# Altium PCB DriverFitTracker.PcbDoc
Units mm, origin at the board's own origin, x right, y up, seen from the top; angles counter-clockwise.
Board outline 31 x 26 mm, 4 copper layers (L1 (SIGNAL), L2 (GND), L3 (3V3), L4 (SIGNAL)), stack 1.586 mm thick; 55 components, 38 nets, 226 pads, 126 vias.
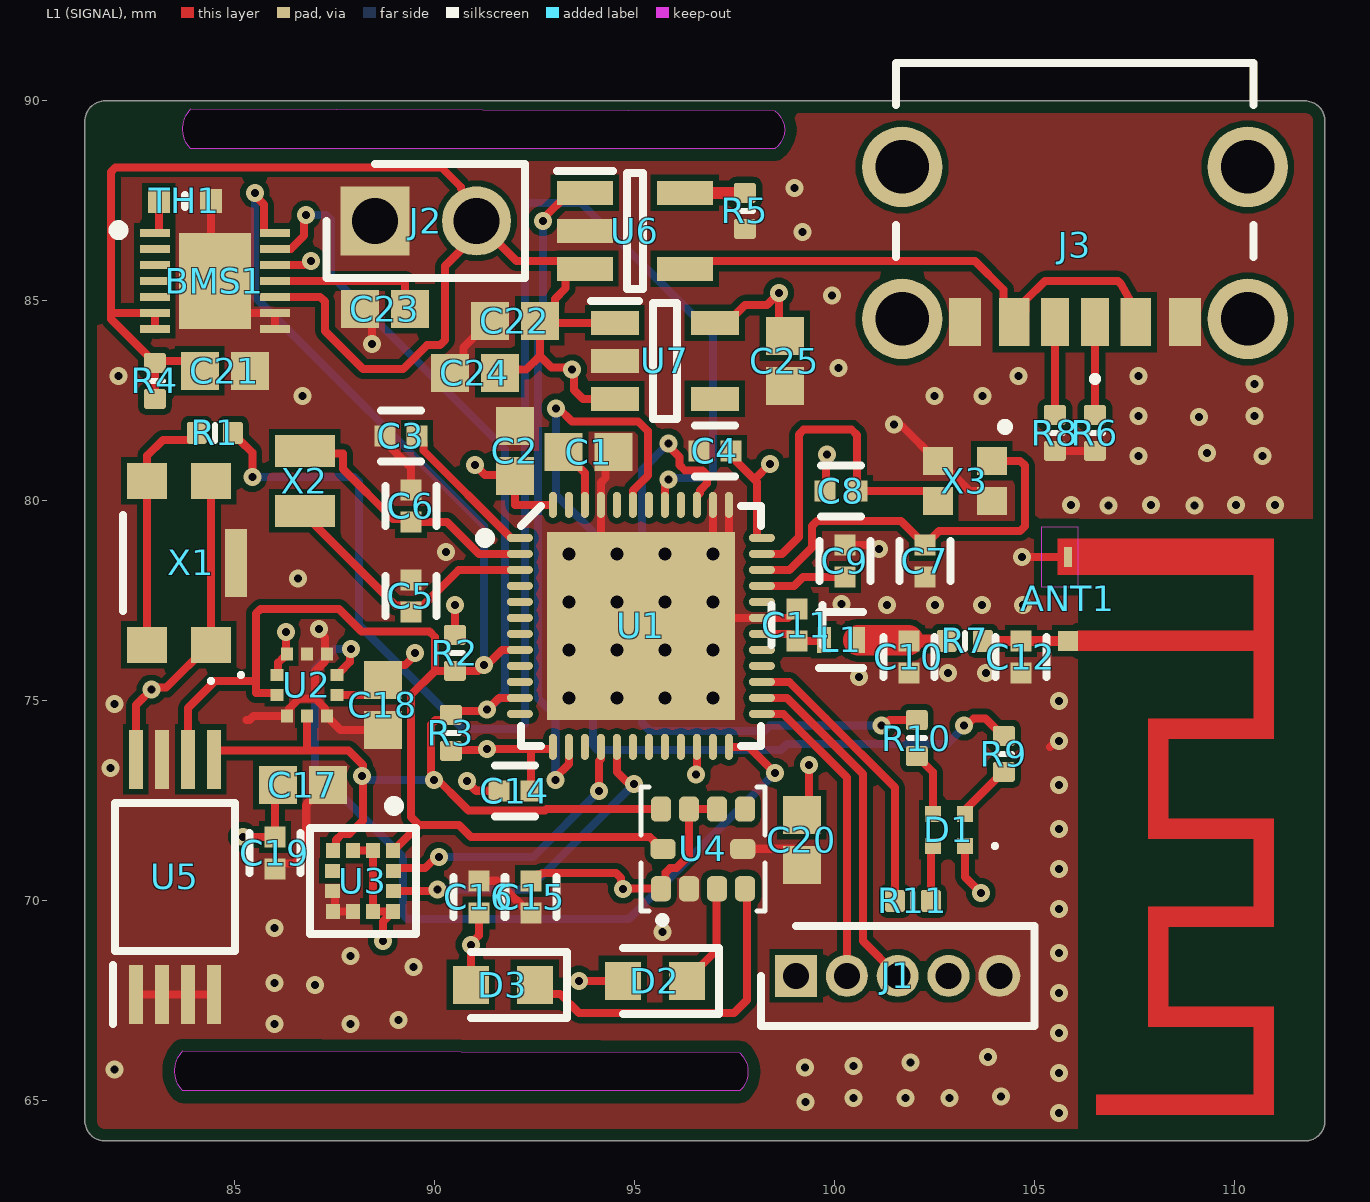
[diagram p0: L1 (SIGNAL) view]
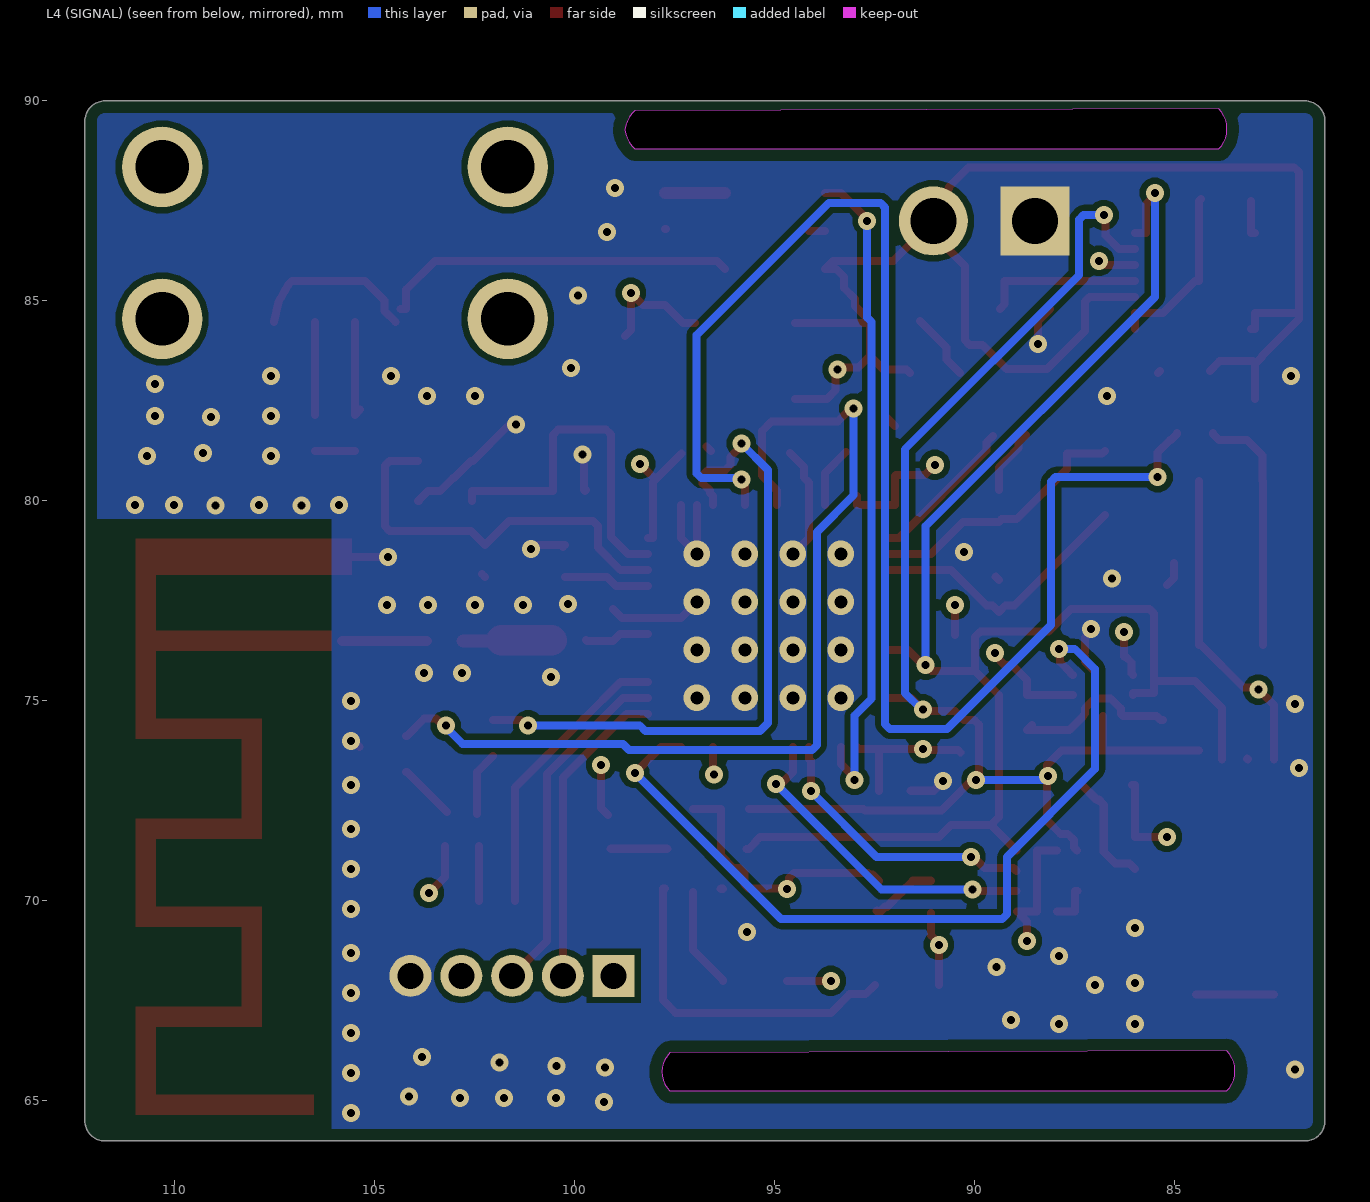
[diagram p1: L4 (SIGNAL) view, seen from below]
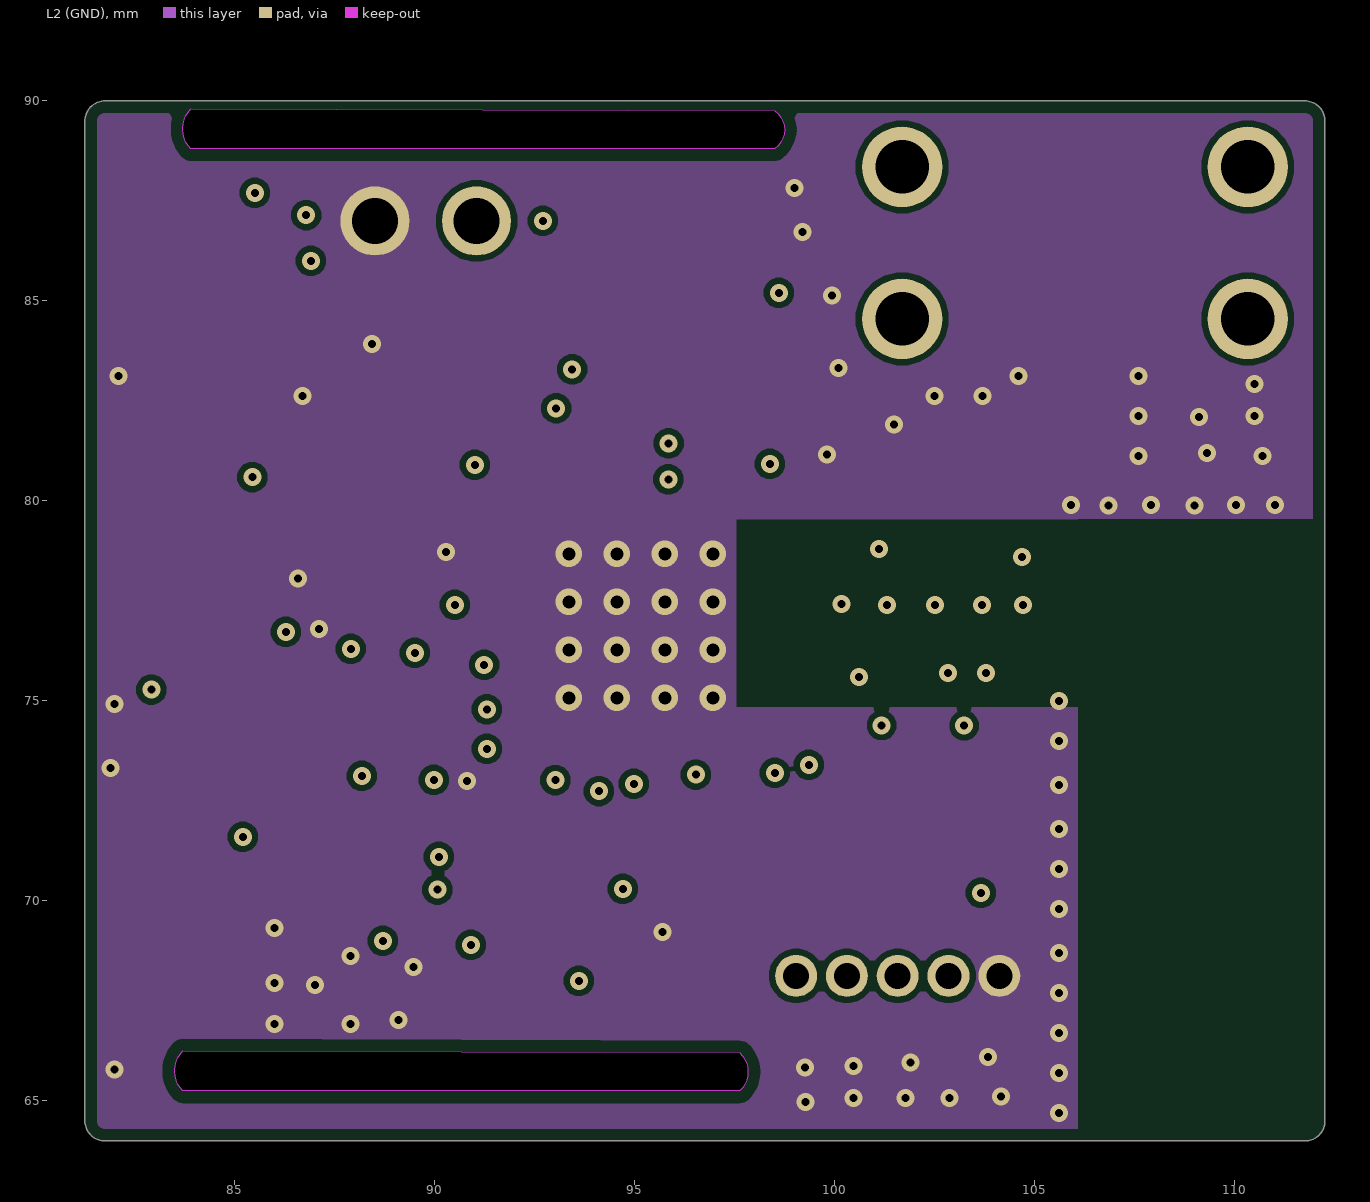
[diagram p2: L2 (GND)]
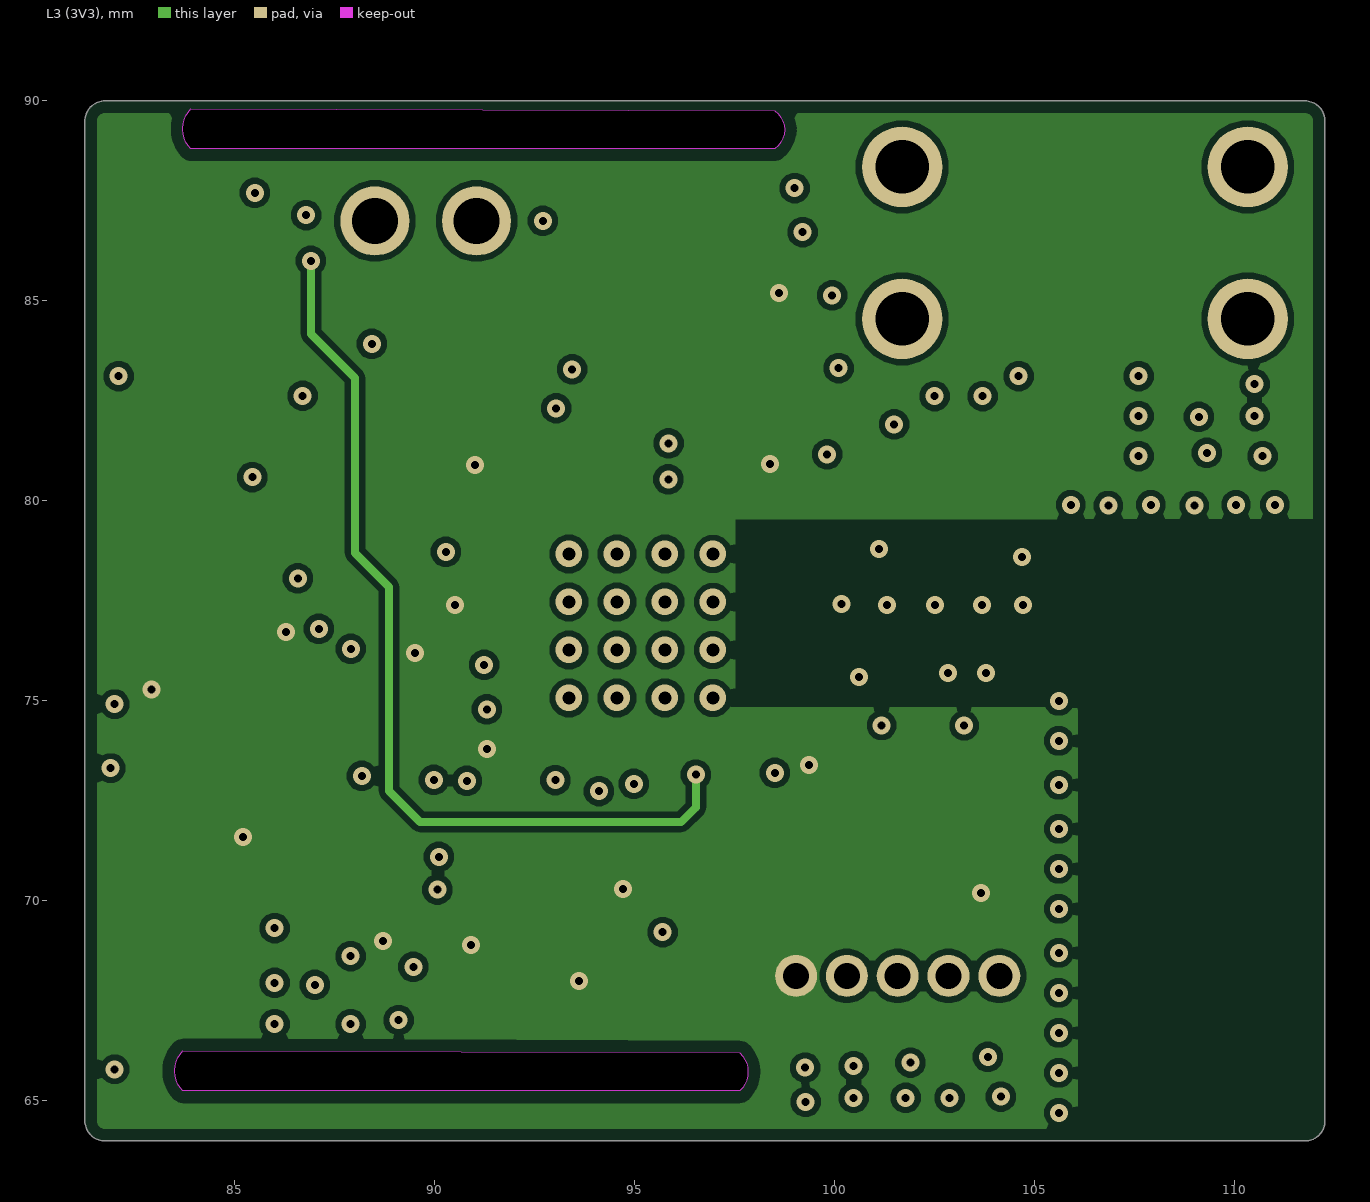
[diagram p3: L3 (3V3)]
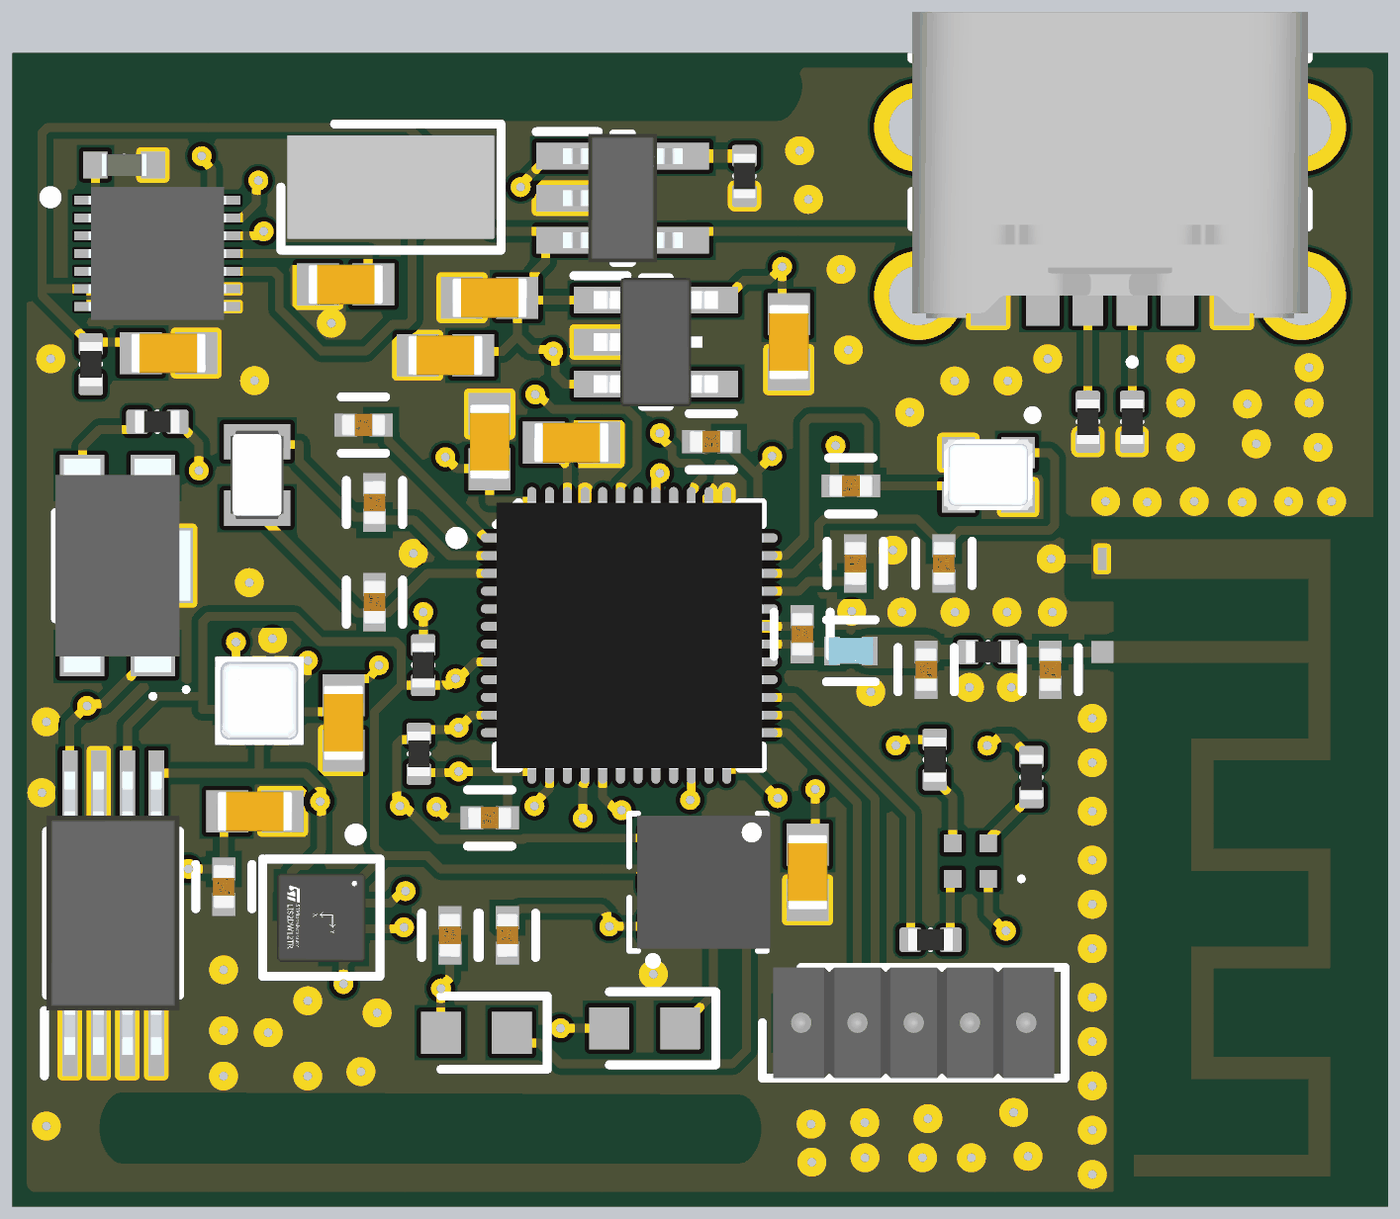
[diagram p4: 3D render of the assembled board from above, using the file's embedded part models]

## Layer stack, top to bottom
Top Solder: solder mask 0.035, SM-001, Dk 4
L1 (SIGNAL): signal copper 0.035
Dielectric 1: prepreg 0.2104, PP-017, Dk 4.6
L2 (GND): signal copper 0.0152
Dielectric 3: core 1.065, Core-039, Dk 4.6
L3 (3V3): signal copper 0.0152
Dielectric 5: prepreg 0.2104, PP-017, Dk 4.6
L4 (SIGNAL): signal copper 0.035
Bottom Solder: solder mask 0.035, SM-001, Dk 4

## Board outline
81.25,64.5 ccw(c81.75,64.5) 81.75,64 111.75,64 ccw(c111.75,64.5) 112.25,64.5 112.25,89.5 ccw(c111.75,89.5) 111.75,90 81.75,90 ccw(c81.75,89.5) 81.25,89.5
cut-out: 83.7,66.25 97.625,66.2 cw(c97.161,65.725) 97.825,65.733 cw(c97.142,65.733) 97.625,65.25 83.7,65.25 cw(c84.183,65.733) 83.5,65.733 83.5,65.767 cw(c84.183,65.767)
cut-out: 83.9,89.8 98.5,89.75 cw(c98.061,89.215) 98.75,89.283 cw(c98.042,89.343) 98.5,88.8 83.9,88.8 cw(c84.383,89.283) 83.7,89.283 83.7,89.317 cw(c84.383,89.317)

## Design rules (kind name [scope] priority, off if disabled: settings)
BoardOutlineClearance "BoardOutlineClearance AISLER" [All] p1: gap=0.3 ignorepadtopadclearanceinfootprint=FALSE
Clearance "Clearance AISLER Complex" [All] p1: gap=0.15 ignorepadtopadclearanceinfootprint=FALSE except(0: Arc-Text Track-Text SMDPad-Text THPad-Text Via-Text Fill-Text Poly-Text Region-Text Text-Text Text-Hole; 0.125: Arc-Arc Arc-Track Arc-SMDPad Arc-THPad Arc-Via Track-Track Track-SMDPad Track-THPad Track-Via SMDPad-SMDPad SMDPad-THPad SMDPad-Via THPad-THPad THPad-Via Via-Via; 0.2: Fill-Fill Fill-Poly Fill-Region Poly-Poly Poly-Region Region-Region; 0.25: Arc-Hole Track-Hole SMDPad-Hole THPad-Hole Via-Hole Fill-Hole Poly-Hole Region-Hole)
HoleSize "HoleSize NPTH AISLER Complex" [PadIsPlated = 'False'] p1: absolutevalues=TRUE maxlimit=5.8 minlimit=0.2 maxpercent=80.000 minpercent=20.000
HoleSize "HoleSize PTH AISLER Complex" [All] p2: absolutevalues=TRUE maxlimit=5.65 minlimit=0.2 maxpercent=80.000 minpercent=20.000
HoleToHoleClearance "HoleToHoleClearance NPTH-NPTH AISLER" [PadIsPlated = 'False' vs PadIsPlated = 'False'] p1: gap=0.3 allowstackedmicrovias=FALSE // 0.25 + (0.05/2 + 0.05/2)
HoleToHoleClearance "HoleToHoleClearance NPTH-PTH AISLER" [PadIsPlated = 'False' vs PadIsPlated = 'True'] p2: gap=0.35 allowstackedmicrovias=FALSE // 0.25 + (0.05/2 + 0.15/2)
HoleToHoleClearance "HoleToHoleClearance Rest AISLER" [All] p3: gap=0.4 allowstackedmicrovias=FALSE // 0.25 + (0.15/2 + 0.15/2)
MinimumAnnularRing "MinimumAnnularRing AISLER" [All] p1: minimumring=0.2
MinimumSolderMaskSliver "MinimumSolderMaskSliver AISLER" [All] p1: minsoldermaskwidth=0.115 // AISLER enlarges all Solder Mask Openings by 20um by default, final Sliver is thus 0.075mm
PlaneClearance "PlaneClearance AISLER Complex" [All] p1: clearance=0.15
PolygonConnect [All] p1: connectstyle=Direct reliefconductorwidth=0.254 reliefentries=4 polygonreliefangle="90 Angle" airgapwidth=0.254
RoutingVias "RoutingVias AISLER Complex" [All] p1: holewidth=0.75 width=1.15 viastyle="Through Hole" minholewidth=0.2 minwidth=0.6 maxholewidth=1 maxwidth=1.4 // only minimum size relevant
SilkToSolderMaskClearance "SilkToSolderMaskClearance AISLER" [IsPad] p1: minsilkscreentomaskgap=0.127 clearancetoexposedcopper=TRUE
SolderMaskExpansion [All] p1: expansion=0.102 istentingtop=FALSE
Width "Width AISLER Complex" [All] p1: maxlimit=1.5 minlimit=0.125 preferedwidth=0.5 // only min is relevant
25 further rules are at their usual default settings.

## Classes and differential pairs
component class SENSORS: C15 C16 C17 C18 C19 C20 D2 D3 S U2 U3 U4 U5
component class PMIC_USB: BMS1 C21 C22 C23 C24 C25 J2 J3 R4 R5 R6 R8 TH1 U6 U7
component class MCU: ANT1 C1 C2 C3 C4 C5 C6 C7 C8 C9 C10 C11 C12 C14 D1 J1 L1 R1 R2 R3 R7 R9 R10 R11 SWD1 U1 X1 X2 X3

## Components (designator, comment, footprint, x,y, rotation, side; value= is the part's Value field where it differs from the comment)
ANT1 "2.4GHz TI AN053 Patch Antenna" "2.4GHz TI AN053 Patch Antenna Right Original" 105.825,78.6 r270 top
BMS1 "MAX17260SETD+" SON40P300X300X80-15N 84.5,85.5 r0 top
C1 "1u" CAPC1608X90X40NL10T20 93.845,81.229 r0 top
C2 "4.7u" CAPC1608X90X40NL10T20 92,81.25 r90 top
C3 "100n" FP-C0402-BB-MFG 89.15,81.625 r180 top value="0.10 μF"
C4 "100n" FP-C0402-BB-MFG 97,81.25 r180 top value="0.10 μF"
C5 "12p" FP-C0402-BB-MFG 89.4,77.625 r90 top value="0.10 μF"
C6 "12p" FP-C0402-BB-MFG 89.4,79.875 r90 top value="0.10 μF"
C7 "12p" FP-C0402-BB-MFG 102.25,78.5 r270 top value="0.10 μF"
C8 "12p" FP-C0402-BB-MFG 100.15,80.25 r180 top value="0.10 μF"
C9 "100p" FP-C0402-BB-MFG 100.25,78.5 r90 top value="0.10 μF"
C10 "N.C." FP-C0402-BB-MFG 101.85,76.1 r270 top
C11 "0.8p" FP-C0402-BB-MFG 99.05,76.9 r90 top
C12 "1.2p" FP-C0402-BB-MFG 104.65,76.1 r270 top value="0.10 μF"
C14 "100n" FP-C0402-BB-MFG 92,72.75 r180 top value="0.10 μF"
C15 "10u" FP-C0402-BB-MFG 92.4,70.1 r270 top value="0.10 μF"
C16 "100n" FP-C0402-BB-MFG 91.1,70.1 r90 top value="0.10 μF"
C17 "100n" CAPC1608X90X40NL10T20 86.7,72.9 r180 top
C18 "100n" CAPC1608X90X40NL10T20 88.7,74.9 r90 top
C19 "100n" FP-C0402-BB-MFG 86,71.2 r270 top value="0.10 μF"
C20 "1u" CAPC1608X90X40NL10T20 99.175,71.525 r270 top
C21 "10u" CAPC1608X90X40NL10T20 84.75,83.25 r0 top
C22 "10u" CAPC1608X90X40NL10T20 92,84.5 r180 top
C23 "100n" CAPC1608X90X40NL10T20 88.75,84.8 r0 top
C24 "1u" CAPC1608X90X40NL10T20 91,83.2 r180 top
C25 "1u" CAPC1608X90X40NL10T20 98.75,83.5 r270 top
D1 "LTRBR37G-4R4S-0125-0" RGBLED_LTRBR37G4R4S01250 102.85,71.775 r270 top
D2 "LXZ1-PM01" LEDC1608X70N 95.5,68 r180 top
D3 "LXZ1-PM01" LEDC1608X70N 91.7,67.9 r180 top
J1 "M52-040023V0545" 5_PINS_HEADER_HDRV5W46P0X127_1X5_635X250X650P 99.03,68.125 r0 top
J2 "5-146277-2" HEADER_2PINS 88.5,87 r0 top
J3 "217175-0001" USB_C_CONNECTOR 106,87.5 r180 top
L1 "3.9n" FP-LQW15AN_00-W0_6-0_1-MFG 100.15,76.525 r0 top
R1 "10k" RESC0402(1005)_L#1 84.5,81.7 r0 top
R2 "10k" RESC0402(1005)_L#1 90.5,76.2 r90 top
R3 "10k" RESC0402(1005)_L#1 90.4,74.2 r270 top
R4 "1R" RESC0402(1005)_L#1 83,83 r90 top
R5 "10k" RESC0402(1005)_L#1 97.75,87.25 r90 top
R6 "10k" RESC0402(1005)_L#2 106.5,81.7 r90 top
R7 "0R" RESC0402(1005)_L#1 103.25,76.5 r180 top value=0
R8 "10k" RESC0402(1005)_L#1 105.5,81.7 r90 top
R9 "220R" RESC0402(1005)_L#1 104.225,73.675 r270 top
R10 "220R" RESC0402(1005)_L#1 102.046,74.071 r270 top
R11 "220R" RESC0402(1005)_L#1 101.95,70 r0 top
TH1 "NTCG103JF103FT1" THRMC1005X55N 83.75,87.5 r180 top
U1 "nRF52832-QFAA" QFN40P600X600X90-48N 95.15,76.875 r0 top
U2 "BMP581" BMP581 86.8,75.4 r0 top
U3 "LIS2DW12TR" FP-LGA12-DM00170568-MFG 88.2,70.5 r270 top
U4 "BH1790GLC-E2" PQFN70P280X280X100-10N 96.7,71.3 r90 top
U5 "AT24C512C-XHM-T" SOP65P640X120-8N 83.5,70.6 r90 top
U6 "MCP73831T-2ACI_OT" SOT95P270X145-5N 95,86.75 r0 top
U7 "STLQ015M33R" SOT95P280X145-5N 95.75,83.5 r0 top
X1 "435441019830" BUTTON_435441019830 83.6,78.45 r270 top
X2 "32.768kHz" CRYSTAL_XTAL_CM8V-T1A-32.768KHZ-9PF-20PPM-TA-QC 86.75,80.5 r270 top
X3 "32MHz" OSC_XRCGB32M000F1H01R0 103.25,80.5 r270 top

## Footprints (in the part's own frame and the unit in brackets; to place one, negate y for a bottom-side part, rotate by r counter-clockwise, add the part's x,y. Pads: shape width x height; smd on the part's side, far side on the other; paste and mask are expansions set on the pad)
"2.4GHz TI AN053 Patch Antenna Right Original" [mm]
  rect 0.5x0.5 smd paste+0 mask+0: 1(2.1,0)
  rect 0.5x0.2 smd: 2(0,0)
  L1 (SIGNAL) region: 1.85,0.25 1.85,4.65 2.35,4.65 2.35,0.25
  L1 (SIGNAL) region: -0.45,-0.25 -0.45,4.65 0.45,4.65 0.45,-0.25
  L1 (SIGNAL) region: -0.45,4.65 -0.45,5.15 4.55,5.15 4.55,4.65
  L1 (SIGNAL) region: 4.05,2.01 4.05,4.65 4.55,4.65 4.55,2.01
  L1 (SIGNAL) region: 4.55,2.01 4.55,2.51 6.55,2.51 6.55,2.01
  L1 (SIGNAL) region: 6.55,2.01 6.55,4.65 7.05,4.65 7.05,2.01
  L1 (SIGNAL) region: 6.55,4.65 6.55,5.15 9.25,5.15 9.25,4.65
  L1 (SIGNAL) region: 8.75,2.01 8.75,4.65 9.25,4.65 9.25,2.01
  L1 (SIGNAL) region: 9.25,2.01 9.25,2.51 11.25,2.51 11.25,2.01
  L1 (SIGNAL) region: 11.25,4.65 11.25,5.15 13.95,5.15 13.95,4.65
  L1 (SIGNAL) region: 13.45,0.71 13.45,4.65 13.95,4.65 13.95,0.71
  L1 (SIGNAL) region: 11.25,2.01 11.25,4.65 11.75,4.65 11.75,2.01
  L1 (SIGNAL) keep-out region: 0.763,0.246 0.763,-0.655 -0.757,-0.655 -0.757,0.246 0.763,0.246
  Multi-Layer pour cut-out: -0.95,0.25 -0.95,5.45 14.25,5.45 14.25,0.25
5_PINS_HEADER_HDRV5W46P0X127_1X5_635X250X650P [mm]
  rect 1.05x1.05 / inner round 1.05 / far side rect 1.05x1.05 hole 0.65: 1(0,0)
  round 1.05 hole 0.65: 2(1.27,0) 3(2.54,0) 4(3.81,0) 5(5.08,0)
  silkscreen extent -0.87,-1.25 5.95,1.25, body extent -0.64,-1.25 5.71,1.25, height 6.5
BMP581 [mm]
  rect 0.325x0.3 smd mask+0.07: 1(-0.75,0.25) 2(-0.75,-0.25) 6(0.75,-0.25) 7(0.75,0.25)
  rect 0.3x0.325 smd mask+0.07: 3(-0.5,-0.775) 4(0,-0.775) 5(0.5,-0.775) 8(0.5,0.775) 9(0,0.775) 10(-0.5,0.775)
  silkscreen extent -1.7,0.2 -1.6,0.3, body extent -1,-1 1,1, height 0.8
BUTTON_435441019830 [mm]
  rect 0.9x1 smd: 1(2.05,0.8) 2(2.05,-0.8) 3(-2.05,-0.8) 4(-2.05,0.8)
  rect 1.7x0.55 smd: G1(0,1.425)
  silkscreen extent -1.2,-1.4 3,0.85, body extent -2.41,-1.4 2.41,1.65, height 2
CAPC1608X90X40NL10T20 [mm] "Chip Capacitor, 2-Leads, Body 1.70x0.90mm, IPC Medium Density"
  rect 0.95x0.95 smd: 1(-0.625,0) 2(0.625,0)
  body extent -0.85,-0.45 0.85,0.45, height 0.9
CRYSTAL_XTAL_CM8V-T1A-32.768KHZ-9PF-20PPM-TA-QC [mm]
  rect 0.8x1.5 smd: 1(-0.75,0) 2(0.75,0)
  body extent -1,-0.6 1,0.6, height 0.6
FP-C0402-BB-MFG [mm]
  rect 0.52x0.52 smd paste+0 mask+0: 1(-0.4,0) 2(0.4,0)
  silkscreen extent -0.5,-0.64 0.5,0.64, body extent -0.8,-0.4 0.8,0.4, height 0.25
FP-LGA12-DM00170568-MFG [mm] "IMU LIS2DW12TR"
  rect 0.375x0.35 smd paste+0 mask+0: 1(-0.763,0.75) 2(-0.763,0.25) 3(-0.763,-0.25) 4(-0.763,-0.75) 7(0.763,-0.75) 8(0.763,-0.25) 9(0.763,0.25) 10(0.763,0.75)
  rect 0.35x0.375 smd paste+0 mask+0: 5(-0.25,-0.763) 6(0.25,-0.763) 11(0.25,0.763) 12(-0.25,0.763)
  silkscreen extent -2,-1.33 1.33,1.33, body extent -1.55,-1.55 1.55,1.55, height 0.25
FP-LQW15AN_00-W0_6-0_1-MFG [mm]
  rect 0.35x0.65 smd paste+0 mask+0: 1(-0.425,0) 2(0.425,0)
  silkscreen extent -0.55,-0.7 0.55,0.7, body extent -0.7,-0.45 0.7,0.45, height 0.25
HEADER_2PINS [mm]
  rect 1.725x1.725 / inner round 1.725 / far side rect 1.725x1.725 hole 1.15: 1(0,0)
  round 1.725 hole 1.15: 2(2.54,0)
  silkscreen extent -1.21,-1.43 3.75,1.43, body extent -1.07,-1.17 3.61,1.17, height 5.84
LEDC1608X70N [mm]
  rect 0.9x0.95 smd: 1(-0.8,0) 2(0.8,0)
  silkscreen extent -1.6,-0.82 0.8,0.82
OSC_XRCGB32M000F1H01R0 [mm] "CRYSTAL 32MHZ"
  rect 0.7x0.75 smd: 1(-0.5,0.675) 3(0.5,-0.675) NC(-0.5,-0.675) NC(0.5,0.675)
  silkscreen extent -1.45,0.9 -1.25,1.1, body extent -0.8,-1 0.8,1, height 0.7
PQFN70P280X280X100-10N [mm] "BH1790GLC-E2 PPG"
  rrect50% 0.63x0.5 smd: 1(-0.995,1.05) 2(-0.995,0.35) 3(-0.995,-0.35) 4(-0.995,-1.05) 6(0.995,-1.05) 7(0.995,-0.35) 8(0.995,0.35) 9(0.995,1.05)
  rrect50% 0.5x0.63 smd: 5(0,-0.995) 10(0,0.995)
  silkscreen extent -1.83,-1.55 1.55,1.55, body extent -1.5,-1.63 1.5,1.37, height 1.01
QFN40P600X600X90-48N [mm] "NRF52832"
  oval 0.65x0.2 smd: 1(-3.025,2.2) 2(-3.025,1.8) 3(-3.025,1.4) 4(-3.025,1) 5(-3.025,0.6) 6(-3.025,0.2) 7(-3.025,-0.2) 8(-3.025,-0.6) 9(-3.025,-1) 10(-3.025,-1.4) 11(-3.025,-1.8) 12(-3.025,-2.2) 25(3.025,-2.2) 26(3.025,-1.8) 27(3.025,-1.4) 28(3.025,-1) 29(3.025,-0.6) 30(3.025,-0.2) 31(3.025,0.2) 32(3.025,0.6) 33(3.025,1) 34(3.025,1.4) 35(3.025,1.8) 36(3.025,2.2)
  oval 0.2x0.65 smd: 13(-2.2,-3.025) 14(-1.8,-3.025) 15(-1.4,-3.025) 16(-1,-3.025) 17(-0.6,-3.025) 18(-0.2,-3.025) 19(0.2,-3.025) 20(0.6,-3.025) 21(1,-3.025) 22(1.4,-3.025) 23(1.8,-3.025) 24(2.2,-3.025) 37(2.2,3.025) 38(1.8,3.025) 39(1.4,3.025) 40(1,3.025) 41(0.6,3.025) 42(0.2,3.025) 43(-0.2,3.025) 44(-0.6,3.025) 45(-1,3.025) 46(-1.4,3.025) 47(-1.8,3.025) 48(-2.2,3.025)
  rect 4.7x4.7 smd: 49(0,0)
  silkscreen extent -4.02,-3 3,3, body extent -3.02,-3.02 3.02,3.02, height 0.86
RESC0402(1005)_L#1 [mm] "Chip Resistor, Body 1.0x0.5mm, IPC High Density"
  rrect25% 0.5x0.55 smd: 1(-0.45,0) 2(0.45,0)
  silkscreen extent 0,-0.2 0,0.2, body extent -0.5,-0.25 0.5,0.25, height 0.3
RESC0402(1005)_L#2 [mm] "Chip Resistor, Body 1.0x0.5mm, IPC High Density"
  rrect25% 0.5x0.55 smd: 1(-0.45,0) G(0.45,0)
  silkscreen extent 0,-0.2 0,0.2, body extent -0.5,-0.25 0.5,0.25, height 0.3
RGBLED_LTRBR37G4R4S01250 [mm]
  rect 0.4x0.4 smd: 1(0.4,0.4) 2(0.4,-0.4) 3(-0.4,-0.4) 4(-0.4,0.4)
  silkscreen extent 0.35,1.1 0.45,1.2
SON40P300X300X80-15N [mm] "MAX17260SETD+"
  rect 0.75x0.2 smd mask+0.05: 1(-1.5,1.2) 2(-1.5,0.8) 3(-1.5,0.4) 4(-1.5,0) 5(-1.5,-0.4) 6(-1.5,-0.8) 7(-1.5,-1.2) 8(1.5,-1.2) 9(1.5,-0.8) 10(1.5,-0.4) 11(1.5,0) 12(1.5,0.4) 13(1.5,0.8) 14(1.5,1.2)
  rect 1.8x2.4 smd mask+0.05: 15(0,0)
  silkscreen extent -2.54,1.15 -2.29,1.39, body extent -1.55,-1.5 1.55,1.5, height 0.8
SOP65P640X120-8N [mm] "AT24C512C-XHM-T"
  rect 1.475x0.35 smd: 1(-2.938,0.975) 2(-2.938,0.325) 3(-2.938,-0.325) 4(-2.938,-0.975) 5(2.938,-0.975) 6(2.938,-0.325) 7(2.938,0.325) 8(2.938,0.975)
  silkscreen extent -3.67,-1.5 1.85,1.55, body extent -3.2,-1.5 3.2,1.5, height 1.2
SOT95P270X145-5N [mm] "MCP73831T-2ACI_OT BATT MANAGEMENT"
  rect 1.4x0.6 smd: 1(-1.25,0.95) 2(-1.25,0) 3(-1.25,-0.95) 4(1.25,-0.95) 5(1.25,0.95)
  silkscreen extent -1.95,-1.45 0.2,1.5, body extent -1.35,-1.45 1.35,1.45, height 1.45
SOT95P280X145-5N [mm] "LP5907MFX-1.8_NOPB"
  rect 1.2x0.6 smd: 1(-1.25,0.95) 2(-1.25,0) 3(-1.25,-0.95) 4(1.25,-0.95) 5(1.25,0.95)
  silkscreen extent -1.85,-1.45 0.3,1.5, body extent -1.4,-1.45 1.4,1.45, height 1.2
THRMC1005X55N [mm] "NTCG103JF103FT1"
  rect 0.55x0.6 smd: 1(-0.65,0) 2(0.65,0)
  silkscreen extent 0,-0.15 0,0.15, body extent -0.5,-0.25 0.5,0.25, height 0.55
USB_C_CONNECTOR [mm]
  rect 0.7x1.2 smd: A5(-0.5,3.03) B5(0.5,3.03)
  rect 0.76x1.2 smd: A9(1.52,3.03) B9(-1.52,3.03)
  rect 0.8x1.2 smd: A12(2.75,3.03) B12(-2.75,3.03)
  round 2.01 hole 1.34: MH1(-4.32,-0.85) MH2(4.32,-0.85) MH3(-4.32,2.95) MH4(4.32,2.95)
  silkscreen extent -4.47,-3.45 4.47,4.5, body extent -4.47,-3.45 4.47,3.45, height 2.58

## Part data
ANT1: library part "2.4GHz Antenna with GND", "From Application Note AN053"
BMS1: "Battery Management 5.1 A 1-Cell Fuel Gauge with ModelGauge m5 EZ and Optional High-Side Current Sensing", Available at JLCPCB?=Yes, JLCPCB Part #=C350946, Manufacturer_Name="Analog Devices", Mouser Part Number=700-MAX17260SETD+, CorrectManufacturer=MAX17260SETD+, Datasheet Link=https://www.maximintegrated.com/en/ds/MAX17260.pdf, Geometry.Height=0.8mm, Mouser Price/Stock=https://www.mouser.co.uk/ProductDetail/Analog-Devices-Maxim-Integrated/MAX17260SETD%2b?qs=%252BEew9%252B0nqrAfepKB1Fe0%252Bw%3D%3D
C1: library part CMP-001-00017-6, "Multilayer Ceramic Capacitors MLCC - SMD/SMT 50V 1uF X7R 0603 10%", Capacitor Type=Ceramic, Case/Package=0603, CorrectManufacturer=06035C105KAT2A, JLCPCB Part #=C15849, Max Operating Temperature=125°C, Min Operating Temperature=-55°C, Tolerance=10%, Voltage Rating=50V, Mounting Technology=SM, Pins=2, RoHS Compliant=True
C2: library part CMP-001-00017-6, "Chip Capacitor, 100 nF, +/- 10%, 50 V, 0603 (1608 Metric)", Capacitor Type=Ceramic, Case/Package=0603, CorrectManufacturer=0603YW475KAT2A, JLCPCB Part #=C14663, Max Operating Temperature=125°C, Min Operating Temperature=-55°C, Tolerance=10%, Voltage Rating=50V, Mounting Technology=SM, Pins=2, RoHS Compliant=True
C3 C4 C14 C16 C19: library part CMP-2008-02046-2, "Multilayer Ceramic Capacitors MLCC - SMD/SMT NEW GLOBAL PN KGM05CR71H104KN 50V 0.1uF X7R 0402 10%", Capacitance="0.10 μF", CorrectManufacturer=04025C104KAT4A, JLCPCB Part #=C1523, Manufacturer=Kemet, Package=C0402-BB, Temperature="-55°C to +125°C", Temperature Characteristic=X5R, Temperature Coefficient=15%, Temperature Range High=+125°C, Temperature Range Low=-55°C, Tolerance=0.1, Voltage Rating="10 V", Automotive=No, Category=Cap, ComponentLink2Description=Datasheet, ComponentLink2URL=https://content.kemet.com/datasheets/KEM_C1002_X7R_SMD.pdf, Device Class L1="Passive Components", Device Class L2=Capacitors, Device Class L3="Ceramic Capacitors", Digikey Description="CAP CER 0.1UF 10V X5R 0402", Height=0.55mm, Ipc Land Pattern Name=CAPC10050X50, Lead Free=Yes, Material=Ceramic, Mouser Description="Capacitor 100 nF 10 VDC 0402", Octopart=https://octopart.com/c0402c104k8pactu-kemet-140039, RoHS=TRUE
C5 C6 C7 C8: library part CMP-2008-02046-2, "Multilayer Ceramic Capacitors MLCC - SMD/SMT 12 pF 50 VDC 5% 0402 C0G (NP0)", Capacitance="0.10 μF", CorrectManufacturer=GRM1555C1H120JA01D, JLCPCB Part #=C1547, Manufacturer=Kemet, Package=C0402-BB, Temperature="-55°C to +125°C", Temperature Characteristic=X5R, Temperature Coefficient=15%, Temperature Range High=+125°C, Temperature Range Low=-55°C, Tolerance=0.1, Voltage Rating="10 V", Automotive=No, Category=Cap, ComponentLink2Description=Datasheet, ComponentLink2URL=https://content.kemet.com/datasheets/KEM_C1002_X7R_SMD.pdf, Device Class L1="Passive Components", Device Class L2=Capacitors, Device Class L3="Ceramic Capacitors", Digikey Description="CAP CER 0.1UF 10V X5R 0402", Height=0.55mm, Ipc Land Pattern Name=CAPC10050X50, Lead Free=Yes, Material=Ceramic, Mouser Description="Capacitor 100 nF 10 VDC 0402", Octopart=https://octopart.com/c0402c104k8pactu-kemet-140039, RoHS=TRUE
C9: library part CMP-2008-02046-2, "Multilayer Ceramic Capacitors MLCC - SMD/SMT 100 pF 50 VDC 5% 0402 C0G (NP0)", Capacitance="0.10 μF", CorrectManufacturer=GRM1555C1H101JA01D, JLCPCB Part #=C1546, Manufacturer=Kemet, Package=C0402-BB, Temperature="-55°C to +125°C", Temperature Characteristic=X5R, Temperature Coefficient=15%, Temperature Range High=+125°C, Temperature Range Low=-55°C, Tolerance=0.1, Voltage Rating="10 V", Automotive=No, Category=Cap, ComponentLink2Description=Datasheet, ComponentLink2URL=https://content.kemet.com/datasheets/KEM_C1002_X7R_SMD.pdf, Device Class L1="Passive Components", Device Class L2=Capacitors, Device Class L3="Ceramic Capacitors", Digikey Description="CAP CER 0.1UF 10V X5R 0402", Height=0.55mm, Ipc Land Pattern Name=CAPC10050X50, Lead Free=Yes, Material=Ceramic, Mouser Description="Capacitor 100 nF 10 VDC 0402", Octopart=https://octopart.com/c0402c104k8pactu-kemet-140039, RoHS=TRUE
C10: library part CMP-2008-02046-2, "DO NOT CONNECT THIS CAPACITOR - RF PURPOSE", CorrectManufacturer=NOT_CONNECT, ComponentLink2Description=Datasheet, ComponentLink2URL=https://content.kemet.com/datasheets/KEM_C1002_X7R_SMD.pdf
C11: library part CMP-2008-02046-2, "Multilayer Ceramic Capacitors MLCC - SMD/SMT 0.8 pF 50 VDC 0.05 pF 0402 C0G (NP0) AEC-Q200", Capacitance="0.10 μF", CorrectManufacturer=GCQ1555C1HR80WB01D, JLCPCB Part #=C172820, Manufacturer="Murata Electronics", Package=C0402-BB, Temperature="-55°C to +125°C", Temperature Characteristic=X5R, Temperature Coefficient=15%, Temperature Range High=+125°C, Temperature Range Low=-55°C, Tolerance=0.1, Voltage Rating="10 V", Automotive=No, Category=Cap, ComponentLink2Description=Datasheet, ComponentLink2URL=https://content.kemet.com/datasheets/KEM_C1002_X7R_SMD.pdf, Device Class L1="Passive Components", Device Class L2=Capacitors, Device Class L3="Ceramic Capacitors", Digikey Description="CAP CER 0.1UF 10V X5R 0402", Height=0.55mm, Ipc Land Pattern Name=CAPC10050X50, Lead Free=Yes, Material=Ceramic, Mouser Description="Capacitor 100 nF 10 VDC 0402", Octopart=https://octopart.com/c0402c104k8pactu-kemet-140039, RoHS=TRUE
C12: library part CMP-2008-02046-2, "Multilayer Ceramic Capacitors MLCC - SMD/SMT NEW GLOBAL PN KGM05ACG1H1R2BN 50V 1.2pF C0G 0402 .1pF Tol", Capacitance="0.10 μF", CorrectManufacturer=04025A1R2BAT4A, JLCPCB Part #=C76955, Manufacturer=Kemet, Package=C0402-BB, Temperature="-55°C to +125°C", Temperature Characteristic=X5R, Temperature Coefficient=15%, Temperature Range High=+125°C, Temperature Range Low=-55°C, Tolerance=0.1, Voltage Rating="10 V", Automotive=No, Category=Cap, ComponentLink2Description=Datasheet, ComponentLink2URL=https://content.kemet.com/datasheets/KEM_C1002_X7R_SMD.pdf, Device Class L1="Passive Components", Device Class L2=Capacitors, Device Class L3="Ceramic Capacitors", Digikey Description="CAP CER 0.1UF 10V X5R 0402", Height=0.55mm, Ipc Land Pattern Name=CAPC10050X50, Lead Free=Yes, Material=Ceramic, Mouser Description="Capacitor 100 nF 10 VDC 0402", Octopart=https://octopart.com/c0402c104k8pactu-kemet-140039, RoHS=TRUE
C15: library part CMP-2008-02046-2, "Multilayer Ceramic Capacitors MLCC - SMD/SMT 10 uF 6.3 VDC 20% 0402 X5R", Capacitance="0.10 μF", CorrectManufacturer=GRM155R60J106ME05D, JLCPCB Part #=C19702, Manufacturer=Kemet, Package=C0402-BB, Temperature="-55°C to +125°C", Temperature Characteristic=X5R, Temperature Coefficient=15%, Temperature Range High=+125°C, Temperature Range Low=-55°C, Tolerance=0.1, Voltage Rating="10 V", Automotive=No, Category=Cap, ComponentLink2Description=Datasheet, ComponentLink2URL=https://content.kemet.com/datasheets/KEM_C1002_X7R_SMD.pdf, Device Class L1="Passive Components", Device Class L2=Capacitors, Device Class L3="Ceramic Capacitors", Digikey Description="CAP CER 0.1UF 10V X5R 0402", Height=0.55mm, Ipc Land Pattern Name=CAPC10050X50, Lead Free=Yes, Material=Ceramic, Mouser Description="Capacitor 100 nF 10 VDC 0402", Octopart=https://octopart.com/c0402c104k8pactu-kemet-140039, RoHS=TRUE
C17 C18 C23: library part CMP-001-00017-6, "Multilayer Ceramic Capacitors MLCC - SMD/SMT 50V 0.1 uF X7R 0603 10% AEC-Q200", Capacitor Type=Ceramic, Case/Package=0603, CorrectManufacturer=KAM15AR71H104KT, JLCPCB Part #=C1523, Max Operating Temperature=125°C, Tolerance=10%, Voltage Rating=50V, Mounting Technology=SM, Pins=2, RoHS Compliant=True
C20 C24 C25: library part CMP-001-00017-6, "Multilayer Ceramic Capacitors MLCC - SMD/SMT 50V 1uF X7R 0603 10%", Capacitor Type=Ceramic, Case/Package=0603, CorrectManufacturer=06035C105KAT2A, JLCPCB Part #=C15849, Max Operating Temperature=125°C, Tolerance=10%, Voltage Rating=50V, Mounting Technology=SM, Pins=2, RoHS Compliant=True
C21 C22: library part CMP-001-00017-6, "Multilayer Ceramic Capacitors MLCC - SMD/SMT NEW GLOBAL PN KGM15CR51C106MT", Capacitor Type=Ceramic, Case/Package=0603, CorrectManufacturer=0603YD106MAT2A, JLCPCB Part #=C19702, Max Operating Temperature=125°C, Tolerance=10%, Voltage Rating=50V, Mounting Technology=SM, Pins=2, RoHS Compliant=True
D1: library part RGBLED_LTRBR37G-4R4S-0125-0, "Standard LEDs - SMD LTRBR37G", Manufacturer_Name="ams OSRAM", Mouser Part Number=720-LTRBR37GA6714, CorrectManufacturer=LTRBR37G-4R4S-0125-0, Datasheet Link=https://dammedia.osram.info/media/resource/hires/osram-dam-24639129/LTRB%20R37G_EN.pdf, Geometry.Height=0.35mm, Mouser Price/Stock=https://www.mouser.co.uk/ProductDetail/ams-OSRAM/LTRBR37G-4R4S-0125-0?qs=vvQtp7zwQdPO5tl4HQ7ftA%3D%3D
D2: library part LED_19-217/GHC-YR1S2/3T, "Standard LEDs - SMD Brilliant Green Everlight", Available at JLCPCB?=Yes, CorrectManufacturer=19-217/GHC-YR1S2/3T, JLCPCB Part #=C72043, Manufacturer_Name=Everlight, Mouser Part Number=638-19217GHCYR1S23T, Datasheet Link=https://pt.mouser.com/datasheet/2/143/19-217-GHC-YR1S2-3T-1663276.pdf, Geometry.Height=0.96mm, JLCPCB Link=https://jlcpcb.com/partdetail/EverlightElec-19_217_GHC_YR1S23T/C72043, Mouser Price/Stock=https://pt.mouser.com/ProductDetail/Everlight/19-217-GHC-YR1S2-3T?qs=8cKuZ6Ok2lZjmFTUzVFjDg%3D%3D
D3: library part LED_19-217/GHC-YR1S2/3T, "High Power LEDs - Single Color Green", Available at JLCPCB?=Yes, CorrectManufacturer=19-217/GHC-YR1S2/3T, JLCPCB Part #=C72043, Manufacturer_Name=Everlight, Mouser Part Number=638-19217GHCYR1S23T, Datasheet Link=https://pt.mouser.com/datasheet/2/143/19-217-GHC-YR1S2-3T-1663276.pdf, Geometry.Height=0.96mm, JLCPCB Link=https://jlcpcb.com/partdetail/EverlightElec-19_217_GHC_YR1S23T/C72043, Mouser Price/Stock=https://pt.mouser.com/ProductDetail/Everlight/19-217-GHC-YR1S2-3T?qs=8cKuZ6Ok2lZjmFTUzVFjDg%3D%3D
J1: library part 5_PINS_HEADER_M52-040023V0545, "Headers & Wire Housings Pin1.27mm Tail,Vert SIL, 5P, Single Row", Manufacturer_Name=Harwin, Mouser Part Number=855-M52-040023V0545, CorrectManufacturer=M52-040023V0545, Datasheet Link=https://cdn.harwin.com/pdfs/M52-040023VXX45.pdf, Geometry.Height=6.5mm, Mouser Price/Stock=https://www.mouser.co.uk/ProductDetail/Harwin/M52-040023V0545?qs=wuXwK9wHm9ubXDya5zRNiw%3D%3D
J2: library part BATT_CONN_1, "Headers & Wire Housings 2P HEADER GOLD 30u single row", Manufacturer_Name="TE Connectivity", Mouser Part Number=571-5-146277-2, Arrow Part Number=5-146277-2, Arrow Price/Stock=https://www.arrow.com/en/products/5-146277-2/te-connectivity?region=nac, CorrectManufacturer=5-146277-2, Datasheet Link=https://www.te.com/commerce/DocumentDelivery/DDEController?Action=srchrtrv&DocNm=146277&DocType=Customer+Drawing&DocLang=English, Geometry.Height=8.23mm, Mouser Price/Stock=https://www.mouser.co.uk/ProductDetail/TE-Connectivity/5-146277-2?qs=bwpFY26eRVdSYoepUea0uA%3D%3D
J3: library part USB_C_CONNECTOR, "USB Connectors Top-Mnt SMT 6Ckt Type C Rec Molex", Manufacturer_Name=Molex, Mouser Part Number=538-217175-0001, CorrectManufacturer=217175-0001, Datasheet Link=https://www.molex.com/pdm_docs/sd/2171750001_sd.pdf, Geometry.Height=3.46mm, Mouser Price/Stock=https://www.mouser.co.uk/ProductDetail/Molex/217175-0001?qs=DRkmTr78QARWJMiqNnldSg%3D%3D
L1: library part CMP-06042-000827-1, "RF Inductors - SMD 01005, 3.9nH +-0.2nH S-HQ SMD RF IND", Case Code (Metric)=1005, Case/Package=0402, CorrectManufacturer=MHQ0402PSA3N9CT000, Current=750mA, DC Resistance (DCR)=70mR, Inductance=3.9nH, JLCPCB Part #=C14033, Max Operating Temperature=125°C, Min Operating Temperature=-55°C, Package Quantity=10000, Self Resonant Frequency=10GHz, Test Frequency=100MHz, Core Material=Air, Current Rating=750mA, DC Current=750mA, Depth=0.7mm, Height=0.5mm, Lead Free="Lead Free", Length=1mm, Max DC Current=750mA, Military Standard=Not, Mount="Surface Mount", Number of Pins=2, Packaging="Tape and Reel", Radiation Hardening=No, REACH SVHC="No SVHC", Shielding=Unshielded, Termination=SMD/SMT, Weight=2.8E-05oz, Width=0.02inch
R1 R2 R3 R5 R6 R8: library part CMP-009-00149-3, "Thin Film Resistors - SMD 1/16W 10K ohm 1% 50ppm", Case/Package=0402, CorrectManufacturer=RT0402FRE0710KL, JLCPCB Part #=C25744, Max Operating Temperature=155°C, Min Operating Temperature=-55°C, Power=63mW, Tolerance=1%, Pins=2
R4: library part CMP-009-00149-3, "Thin Film Resistors - SMD .1W 1.0ohm 1% 0402 50ppm", Case/Package=0402, CorrectManufacturer=MCS0402MC1008FE000, Max Operating Temperature=155°C, Min Operating Temperature=-55°C, Power=63mW, Tolerance=1%, Pins=2
R7: library part CMP-009-00149-3, "Thin Film Resistors - SMD MCS 0402 VG01 E1 0R0", Case/Package=0402, CorrectManufacturer=MCS0402HZ0000ZE100, Max Operating Temperature=155°C, Min Operating Temperature=-55°C, Power=63mW, Tolerance=1%, Pins=2
R9 R10 R11: library part CMP-009-00149-3, "Thin Film Resistors - SMD .063W 220ohms 1% 0402 50ppm", Case/Package=0402, CorrectManufacturer=MCS04020C2200FE000, JLCPCB Part #=C25744, Max Operating Temperature=155°C, Min Operating Temperature=-55°C, Power=63mW, Tolerance=1%, Pins=2
TH1: "NTC (Negative Temperature Coefficient) Thermistors THERMISTOR, NTC 10K OHM, 1%, 0402", Available at JLCPCB?=Yes, JLCPCB Part #=C209959, Manufacturer_Name=TDK, Mouser Part Number=810-NTCG103JF103FT1, CorrectManufacturer=NTCG103JF103FT1, Datasheet Link=https://product.tdk.com/system/files/dam/doc/product/sensor/ntc/chip-ntc-thermistor/catalog/tpd_commercial_ntc-thermistor_ntcg_en.pdf, Geometry.Height=0.55mm, JLCPCB Link=https://jlcpcb.com/partdetail/Tdk-NTCG103JF103FT1/C209959, Mouser Price/Stock=https://www.mouser.co.uk/ProductDetail/TDK/NTCG103JF103FT1?qs=f0gCvUGw%252BIwLiM8IfZktlg%3D%3D
U1: library part nRF52832_QFAA, "Multi-protocol Bluetooth Low Energy, ANT and 2.4GHz proprietary system-on-chip", CorrectManufacturer=nRF52832-QFAA-R, JLCPCB Part #=C77540, Manufacturer="Nordic Semiconductor", Artikkelnr Noca=N.A., Artikkelnr Simpro=N.A., Footprint Doc=QFN-48, JLCPCB Link=https://jlcpcb.com/partdetail/NordicSemicon-NRF52832_QFAAR/C77540, LatestRevisionDate=2014-11-26, Part Number=nRF52832-QFAA, Pin Count=48, Published=2014-11-26, Publisher="Nordic Semiconductor", Supplier="Nordic Semiconductor"
U2: "Board Mount Pressure Sensors The BMP581 is a very small, low-power and low-noise 24-bit absolute barometric pressure sensor", Manufacturer_Name=BOSCH, Mouser Part Number=262-BMP581, CorrectManufacturer=BMP581, Datasheet Link=https://www.bosch-sensortec.com/media/boschsensortec/downloads/datasheets/bst-bmp581-ds004.pdf, Geometry.Height=0.8mm, Mouser Price/Stock=https://www.mouser.co.uk/ProductDetail/Bosch-Sensortec/BMP581?qs=Li%252BoUPsLEntPL9tlFmcgXg%3D%3D
U3: library part CMP-12175-000006-1, "ACCEL 2-16G I2C/SPI 12LGA STMicroelectronics", JLCPCB Part #=C189624, Manufacturer=STMicroelectronics, Max Supply Voltage=3.6V, Min Supply Voltage=1.62V, Operating Supply Current=0.38-90uA, Package=LGA12-DM00170568, Temperature="-40°C to +85°C", Temperature Range High=+85°C, Temperature Range Low=-40°C, Accel Range=2/4/8/16g, Accel Resolution=14bits, Automotive=No, Category=IC, ComponentLink2Description=Datasheet, ComponentLink2URL=https://www.st.com/resource/en/datasheet/lis2dw12.pdf, CorrectManufacturer=LIS2DW12TR, Device Class L1=Sensors, Device Class L2="Motion Sensors", Device Class L3=Accelerometers, Digikey Description="ACCEL 2-16G I2C/SPI 12LGA", Footprint Url=https://www.st.com/content/ccc/resource/technical/document/technical_note/73/17/9c/16/dd/96/4a/01/CD00134799.pdf/files/CD00134799.pdf/jcr:content/translations/en.CD00134799.pdf, Height=0.7mm, JLCPCB Link=https://jlcpcb.com/partdetail/Stmicroelectronics-LIS2DW12TR/C189624, Lead Free=Yes, Mouser Description="Accelerometer Triple ±2g/±4g/±8g/±16g 1.62V to 3.6V 0.244mg/digit/0.488mg/digit/0.976mg/digit/1.952mg/digit 12-Pin LG...", Octopart=https://octopart.com/lis2dw12tr-stmicroelectronics-77080925, RoHS=TRUE, Sensor Output=I2C,SPI
U4: "Light To Frequency & Light To Voltage Opt Sensr Heart Rate Monitor IC 200uA", Available at JLCPCB?=No, Package="LGA-10 Rohm", Availability=Warning, CorrectManufacturer=BH1790GLC-E2, JLCPCB Link=None, MF=Rohm, Mouser-Purchase-URL=https://snapeda.com/shop?store=Mouser&id=2761766, Price=None, SnapEDA_Link=https://www.snapeda.com/parts/BH1790GLC-E2/Rohm/view-part/2761766/?ref=snap
U5: "EEPROM SERIAL EEPROM 512K (64K X 8) 2WIRE 1.7V", Available at JLCPCB?=YES, JLCPCB Part #=C111546, Manufacturer_Name=Microchip, Mouser Part Number=556-AT24C512C-XHM-T, CorrectManufacturer=AT24C512C-XHM-T, Datasheet Link=https://ww1.microchip.com/downloads/en/DeviceDoc/20006161B.pdf, Geometry.Height=1.2mm, JLCPCB Linkl=https://jlcpcb.com/partdetail/MicrochipTech-AT24C512C_XHMT/C111546, Mouser Price/Stock=https://www.mouser.co.uk/ProductDetail/Microchip-Technology/AT24C512C-XHM-T?qs=rNaVQffb%252BteaIrq7vigEzw%3D%3D
U6: "Battery Management Charge mgnt contr", Arrow Part Number=MCP73831T-2ACI/OT, Available at JLCPCB?=Yes, JLCPCB Part #=C424093, Manufacturer_Name=Microchip, Mouser Part Number=579-MCP73831T-2ACIOT, Arrow Price/Stock=https://www.arrow.com/en/products/mcp73831t-2aciot/microchip-technology?region=nac, CorrectManufacturer=MCP73831T-2ACI/OT, Datasheet Link=http://ww1.microchip.com/downloads/en/DeviceDoc/20001984g.pdf, Geometry.Height=1.45mm, Mouser Price/Stock=https://www.mouser.co.uk/ProductDetail/Microchip-Technology/MCP73831T-2ACI-OT?qs=yUQqVecv4qvbBQBGbHx0Mw%3D%3D
U7: "LDO Voltage Regulators 150 mA - ultra low quiescent current linear voltage regulator", JLCPCB Part #=C136154, Manufacturer_Name=STMicroelectronics, Mouser Part Number=511-STLQ015M33R, CorrectManufacturer=STLQ015M33R, Datasheet Link=https://rs.componentsearchengine.com/Datasheets/2/STLQ015M33R.pdf, Geometry.Height=1.45mm, JLCPCB Link=https://jlcpcb.com/partdetail/Stmicroelectronics-STLQ015M33R/C136154, Mouser Price/Stock=https://www.mouser.co.uk/ProductDetail/STMicroelectronics/STLQ015M33R?qs=k5OWtXsTJaojAOdVSaZ6wQ%3D%3D
X1: library part BUTTON_435441019830, "Tactile Switches WS-TASV Tact Switch Washable 4.1x2.8x1.9 mm SMT", Manufacturer_Name="Wurth Elektronik", Mouser Part Number=710-435441019830, CorrectManufacturer=435441019830, Datasheet Link=https://www.we-online.com/catalog/datasheet/435441019830.pdf, Geometry.Height=1.9mm, Mouser Price/Stock=https://www.mouser.co.uk/ProductDetail/Wurth-Elektronik/435441019830?qs=ufv2HEpFn%252BQgnhl%2FsZ0Vfw%3D%3D
X2: library part CRYSTAL_32K, "Crystals 32.768 kHz 9.0 pF +/-20 PPM -40/+85C", CorrectManufacturer=CM8V-T1A-32.768KHZ-9PF-20PPM-TA-QC, Package="SMD-2 Micro Crystal", Check_prices=https://www.snapeda.com/parts/CM8V-T1A-32.768KHZ-9PF-20PPM-TA-QC/Micro+Crystal/view-part/?ref=eda, MF="Micro Crystal", SnapEDA_Link=https://www.snapeda.com/parts/CM8V-T1A-32.768KHZ-9PF-20PPM-TA-QC/Micro+Crystal/view-part/?ref=snap
X3: library part XRCGB32M000F1H01R0, "Crystals 32 MHZ 10PPM 2.0X1.6X", Available at JLCPCB?=Yes, JLCPCB Part #=C914155, Package="SMD-4 Murata", Availability="In Stock", Check_prices=https://www.snapeda.com/parts/XRCGB32M000F1H01R0/Murata/view-part/?ref=eda, CorrectManufacturer=XRCGB32M000F1H01R0, is Basic Part?=No, JLCPCB Link=https://jlcpcb.com/partdetail/985230-XRCGB32M000F1H01R0/C914155, MF="Murata Electronics", Price=None, Purchase-URL=https://pricing.snapeda.com/search/part/XRCGB32M000F1H01R0/?ref=eda, SnapEDA_Link=https://www.snapeda.com/parts/XRCGB32M000F1H01R0/Murata/view-part/?ref=snap

## Via types
v1: diameter 0.45, hole 0.2, L1 (SIGNAL) to L4 (SIGNAL), 110 vias
v2: diameter 0.66, hole 0.33, L1 (SIGNAL) to L4 (SIGNAL), 16 vias

## Nets (pads, with @x,y where several pads share a name; then routed paths per layer and width w, separated by ;. In a path a pad name is that pad's centre, name@x,y a point inside that pad or via, vN(x,y) a via of type N, cw(c..) or ccw(c..) an arc to the next point about the centre after c; other vN are vias at no path point)
ANT: C11.1 L1.1 U1.30 | length 1.6
  L1 (SIGNAL) w0.2: U1.30 98.875,76.675 C11.1 99.7,76.5 L1.1
BATT: BMS1.6 BMS1.7 BMS1.10 C21.1 C22.1 C24.1 J2.2 R4.1 R4.2 U6.3 U7.1 U7.3 | length 39.6
  L1 (SIGNAL) w0.2: R4.1 R4.2 ; BMS1.7@83.1,84.3 BMS1.7 BMS1.6 81.9,84.7 ; C21.1 83.88,83.495 83.045,83.495 R4.2 ; BMS1.10 87.133,85.1 87.25,84.983 87.25,84.25 88.2,83.3 89.207,83.3 89.807,83.9 90.133,83.9 90.25,84.017 90.25,85.87 91.04,86.66 J2.2 ; C24.1 91.708,83.283 92.283,83.283 92.625,83.625 ; v1@93.384,83.335 92.915,83.335 92.625,83.625 ; v1@93.48,83.239 93.48,82.77 93.7,82.55 U7.3 ; U7.1 C22.1@92.625,84.45 ; 81.9,84.7 81.9,88.224 82.017,88.341 90.159,88.341 90.648,87.852 90.648,87.805 91.04,87.413 J2.2 ; 81.9,84.7 81.9,84.55 82.825,83.625 82.825,83.6 82.975,83.45 R4.2 ; J2.2 91.817,86.223 92.04,86 93.033,86 93.55,86 U6.3 93.467,85.8 93.267,85.6 93.267,85.317 93,85.05 93,84.875 C22.1 C22.1@92.625,84.45 ; 92.625,83.625 C22.1@92.625,84.45
  other v1: 93.432,83.287
BMP581_INT: U1.24 U2.7 | length 21.2
  L1 (SIGNAL) w0.2: U2.7 87.563,75.65 87.613,75.7 87.613,75.713 87.878,75.978 87.878,76.285 v1(87.897,76.303) ; U1.24 97.85,73.85 v1(98.5,73.2)
  L4 (SIGNAL) w0.2: v1(87.897,76.303) 87.505,76.303 87.002,75.8 87.002,73.298 89.2,71.1 89.2,69.667 89.317,69.55 94.85,69.55 v1(98.5,73.2)
BMS_PROG: R5.2 U6.5 | length 1.5
  L1 (SIGNAL) w0.3: U6.5 R5.2
BUTTON1: R1.2 U1.41 | length 37.2
  L1 (SIGNAL) w0.2: R1.2@84.95,81.692 84.95,81.675 85.1,81.525 85.117,81.525 85.435,81.208 v1(85.435,80.597) ; U1.41 95.75,80.448 v1(95.839,80.537)
  L4 (SIGNAL) w0.2: v1(85.435,80.597) 87.983,80.597 88.1,80.48 88.1,76.9 90.7,74.3 92.129,74.3 92.246,74.417 92.246,87.334 92.364,87.452 93.648,87.452 96.955,84.145 96.955,80.685 96.838,80.568 95.87,80.568 v1(95.839,80.537)
CHG_STAT: U1.14 U6.1 | length 16.5
  L1 (SIGNAL) w0.2: v1(92.698,87) 92.698,87.048 93.35,87.7 U6.1 ; v1(93.01,73.02) 93.01,73.082 93.35,73.422 U1.14
  L4 (SIGNAL) w0.2: v1(92.698,87) 92.698,84.59 92.58,84.472 92.58,75.061 93.01,74.63 v1(93.01,73.02)
DEC1: C3.1 U1.1 | length 3.7
  L1 (SIGNAL) w0.2: C3.1 89.71,81.465 89.71,81.265 91.9,79.075 U1.1
DEC3: C9.1 U1.33 | length 2.2
  L1 (SIGNAL) w0.2: U1.33 98.975,77.875 99.2,78.1 C9.1
DEC4: C1.1 U1.46 | length 1.5
  L1 (SIGNAL) w0.2: C1.1 93.75,80.698 U1.46
GND: ANT1.2 BMS1.8 BMS1.9 BMS1.15 C1.2 C2.2 C3.2 C4.2 C5.2 C6.2 C7.2 C8.2 C9.2 C10.2 C11.2 C12.2 C14.2 C15.2 C16.2 C17.1 C18.1 C19.2 C20.2 C21.2 C22.2 C23.1 C24.2 C25.2 J1.5 J2.1 J3.A12 J3.B12 R5.1 R6.1 R8.1 TH1.1 U1.31 U1.37 U1.38 U1.45 U1.49 U2.3 U2.5 U2.8 U2.9 U3.6 U3.7 U3.8 U4.2 U4.5 U5.1 U5.2 U5.3 U5.4 U5.7 U6.2 U7.2 X1.G1 X3.NC | length 42.7
  L1 (SIGNAL) w0.2: U5.1 U5.2 U5.3 U5.4 ; TH1.1@84.349,87.551 TH1.1 84.4,85.5 BMS1.15 85.3,84.7 BMS1.9 BMS1.8 ; X1.G1 85.025,78.075 X1.G1@85.2,77.9 ; 85.293,74.522 85.361,74.522 85.464,74.625 U2.3 86.35,74.675 86.35,74.806 86.611,75.066 87,75.066 ; C21.2 C21.2@85.425,83.2 ; v1(87.1,76.8) 87.1,76.732 87.25,76.582 87.25,76.225 U2.8 ; U2.5@87.25,74.688 87.25,74.816 87,75.066 ; U2.8@87.25,76.112 87.25,75.984 87,75.734 87,75.066 ; U2.5 87.3,74.612 87.637,74.275 C18.1 C18.1@88.575,74.4 ; U3.6 87.5,70.25 87.5,69.738 U3.8 ; C23.1 88.425,84.5 v1(88.425,83.925) ; J2.1 J2.1@88.911,86.589 ; C3.2@88.725,81.65 C3.2 88.91,81.465 88.91,81.321 89.193,81.038 89.197,81.038 89.4,80.835 C6.2 ; C24.2 90.712,83.537 90.712,83.837 C22.2 ; C2.2 C2.2@92.25,82.125 ; U6.2 U6.2@94.15,86.75 ; v2(94.55,78.675) 94.15,79.075 U1.45 94.15,80.459 94.271,80.58 94.271,80.846 C1.2@94.625,81.2 ; C4.2 C4.2@96.711,81.361 ; v2(96.95,77.475) 97.35,77.075 U1.31 98.825,77.075 C11.2 ; U1.38 v2(96.95,78.675) 97.35,79.075 U1.37 ; R5.1@97.725,86.8 R5.1 ; v1@99.7,81.2 v1@99.725,81.175 ; C8.2@99.725,80.275 C8.2 99.778,80.278 99.778,81.133 v1(99.806,81.161) ; C9.2@100.302,78.848 C9.2 100.932,78.9 101.032,78.8 v1(101.1,78.8) ; v1(101.479,81.913) 101.527,81.865 101.685,81.865 102.55,81 102.575,81 102.6,81 103.025,80.575 103.043,80.575 103.368,80.25 103.675,80.25 X3.NC@103.925,80 ; C7.2 C7.2@102.328,78.178 ; v1(104.673,78.604) 104.677,78.6 ANT1.2 ; 105.382,73.85 105.532,74 v1(105.6,74) ; R8.1 R6.1
  L1 (SIGNAL) w0.21: U5.7 U5.7@83.188,73.551 ; C19.2 86.136,70.936 86.487,70.936 86.782,71.231 86.782,72.407 86.905,72.53 86.955,72.53 C17.1 ; C5.2 C5.2@89.477,78.102 ; v1(90.8,73) 90.8,72.984 91.034,72.75 C14.2 ; C16.2 91.552,70.5 91.831,70.221 92.197,69.855 92.245,69.855 C15.2 C15.2@92.452,69.752 ; U4.2@96.3,70.305 U4.2 ; U4.5 C20.2@99.1,71.3
  other v1: 105.6,64.7 99.27,64.976 100.47,65.076 101.77,65.076 102.87,65.076 104.15,65.108 105.6,65.7 81.995,65.792 99.254,65.835 100.466,65.871 101.889,65.96 103.825,66.1 105.6,66.7 85.993,66.922 87.893,66.922 89.093,67.022 105.6,67.7 87,67.9 85.993,67.949 89.459,68.349 87.893,68.622 105.6,68.7 95.693,69.222 85.993,69.322 105.6,69.8 105.6,70.8 105.6,71.8 105.6,72.9 81.893,73.322 81.993,74.922 105.6,75 100.6,75.6 102.827,75.7 103.773,75.7 101.3,77.4 102.5,77.4 103.673,77.4 104.7,77.4 100.17,77.421 86.575,78.066 90.276,78.727 106.838,79.883 108.984,79.883 105.9,79.9 107.9,79.9 110.027,79.9 111,79.9 107.593,81.122 110.693,81.122 109.3,81.2 109.1,82.1 107.593,82.122 110.493,82.122 86.694,82.629 102.493,82.622 103.693,82.622 110.493,82.922 82.093,83.122 104.593,83.122 107.593,83.122 100.093,83.322 99.929,85.139 99.193,86.722 98.993,87.822
  other v2: 93.35,75.075 94.55,75.075 95.75,75.075 96.95,75.075 93.35,76.275 94.55,76.275 95.75,76.275 96.95,76.275 93.35,77.475 94.55,77.475 95.75,77.475 93.35,78.675 95.75,78.675
I2C_SCL: BMS1.14 R2.1 U1.8 U2.2 U3.1 U4.10 U5.6 | length 40.8
  L1 (SIGNAL) w0.2: U5.6 83.825,74.825 84.5,75.5 85.521,75.5 ; v1(85.5,87.7) 85.5,87.632 85.725,87.407 85.725,86.7 BMS1.14 ; U2.2 86.05,75.2 85.521,75.2 85.521,75.5 ; U3.1@88.963,71.263 88.963,71.288 89.025,71.35 89.05,71.35 89.6,71.9 ; U1.8 91.675,76.275 91.3,75.9 v1(91.232,75.9) 91.082,75.75 R2.1 90,75.75 ; U4.10 95.654,71.3 95.49,71.464 95.49,71.483 95.373,71.6 90.9,71.6 90.6,71.9 89.6,71.9 ; 85.521,75.5 85.521,77.183 85.638,77.3 87.6,77.3 88.162,76.738 89.862,76.738 89.998,76.602 89.998,75.752 90,75.75 ; 89.6,71.9 89.402,72.098 89.402,74.844 89.402,75.152 90,75.75
  L4 (SIGNAL) w0.2: v1(85.5,87.7) 85.5,85.1 91.232,79.368 v1(91.232,75.9)
I2C_SDA: BMS1.13 R3.1 U1.11 U2.4 U3.4 U4.9 U5.5 | length 35.5
  L1 (SIGNAL) w0.2: U5.5@84.4,73.763 86.8,73.763 ; BMS1.13 86.396,86.3 86.731,86.635 86.731,87.099 v1(86.779,87.147) ; U2.4 86.8,73.763 ; U3.4 87.525,71.338 87.525,71.521 87.681,71.677 87.864,71.677 88.2,72.013 88.2,73.4 87.838,73.763 86.8,73.763 ; U1.11 91.6,75.075 91.268,74.743 90.493,74.743 R3.1 90.272,74.522 90.015,74.522 89.898,74.405 89.898,73.202 90.837,72.263 92.754,72.263 92.786,72.295 U4.9
  L4 (SIGNAL) w0.2: v1(86.779,87.147) 87.283,87.147 87.4,87.03 87.4,85.643 91.752,81.291 91.752,75.201 91.341,74.79 v1(91.299,74.79) ; v1(88.173,73.123) 88.173,73.023 v1(89.973,73.023)
INT1_IMU: U1.16 U3.12 | length 7.1
  L1 (SIGNAL) w0.2: U3.12 89.038,70.825 89.757,70.825 90.032,71.1 v1(90.1,71.1) ; v1(94.102,72.745) 94.102,73.502 94.15,73.55 U1.16
  L4 (SIGNAL) w0.2: v1(90.1,71.1) 92.457,71.1 v1(94.102,72.745)
INT2_IMU: U1.17 U3.11 | length 8.3
  L1 (SIGNAL) w0.2: U3.11 90.064,70.25 v1(90.064,70.281) ; U1.17 94.55,73.225 94.802,72.973 94.927,72.973 v1(94.975,72.925)
  L4 (SIGNAL) w0.2: v1(90.064,70.281) 92.33,70.281 v1(94.975,72.925)
K_B: R10.1 U1.39 | length 16.6
  L1 (SIGNAL) w0.2: v1(95.84,81.44) 95.84,81.372 96.115,81.097 96.115,80.897 96.247,80.765 96.688,80.765 96.805,80.648 96.805,80.44 96.625,80.26 96.625,80.2 96.55,80.125 U1.39 ; v1(101.167,74.39) 101.235,74.39 101.365,74.521 R10.1
  L4 (SIGNAL) w0.2: v1(95.84,81.44) 95.175,80.775 95.175,74.45 95.375,74.25 98.241,74.25 98.381,74.39 v1(101.167,74.39)
K_G: R9.1 U1.43 | length 24.2
  L1 (SIGNAL) w0.2: v1(93.03,82.316) 93.097,82.316 93.428,81.985 95.083,81.985 95.325,81.743 95.325,80.632 94.95,80.257 U1.43 ; v1(103.229,74.385) 103.297,74.385 103.47,74.558 103.767,74.558 104.2,74.125 R9.1
  L4 (SIGNAL) w0.2: v1(93.03,82.316) 93.03,80.145 93.95,79.225 93.95,73.892 94.067,73.775 98.65,73.775 98.8,73.925 102.805,73.925 103.229,74.349 v1(103.229,74.385)
K_R: R11.1 U1.27 | length 7.3
  L1 (SIGNAL) w0.2: U1.27 98.86,75.475 99.78,74.555 101.5,72.835 R11.1
LED1: D2.1 U4.3 | length 2.5
  L1 (SIGNAL) w0.2: D2.1 96.3,68.025 97.044,68.769 U4.3@97.044,70.221
LED2: D3.1 U4.4 | length 8.6
  L1 (SIGNAL) w0.2: D3.1 92.733,67.667 93.133,67.667 93.6,67.2 97.48,67.2 97.8,67.52 97.8,70.305 U4.4
MAX17260_BAT_ALERT: BMS1.12 U1.22 | length 24.7
  L1 (SIGNAL) w0.2: BMS1.12 86.732,85.9 86.832,86 v1(86.9,86) ; v1(96.523,73.157) 96.55,73.157 U1.22
  L3 (3V3) w0.2: v1(86.9,86) 86.9,84.175 88,83.075 88,78.7 88.85,77.85 88.85,72.75 89.625,71.975 96.158,71.975 96.523,72.341 v1(96.523,73.157)
  L4 (SIGNAL) w0.2: v1(96.523,73.157) v1@96.528,73.161
NetBMS1_11: BMS1.11 C23.2 | length 4
  L1 (SIGNAL) w0.2: BMS1.11 89.258,85.5 89.258,84.917 C23.2
NetC10_1: C10.1 L1.2 R7.2 | length 2.2
  L1 (SIGNAL) w0.331: L1.2 100.575,76.522 L1.2@100.585,76.513 ; C10.1@101.838,76.513 C10.1 R7.2
  L1 (SIGNAL) w0.762: L1.2@100.585,76.513 C10.1@101.838,76.513
NetD1_2: D1.2 R11.2 | length 1.4
  L1 (SIGNAL) w0.2: R11.2 D1.2@102.4,71.375
NetD1_3: D1.3 R10.2 | length 1.6
  L1 (SIGNAL) w0.2: R10.2 102.45,73.217 D1.3
NetD1_4: D1.4 R9.2 | length 1.4
  L1 (SIGNAL) w0.2: D1.4@103.2,72.225 104.2,73.225 R9.2
NetJ3_A5: J3.A5 R6.G | length 2.3
  L1 (SIGNAL) w0.2: R6.G J3.A5
NetJ3_B5: J3.B5 R8.2 | length 2.5
  L1 (SIGNAL) w0.2: R8.2@105.369,82.281 R8.2 J3.B5
NetR1_1: R1.1 X1.2 X1.3 | length 6.2
  L1 (SIGNAL) w0.2: X1.2 X1.3 82.808,80.508 82.808,81.133 83.2,81.525 83.9,81.525 84.05,81.675 R1.1
OUT: C2.1 C4.1 C14.1 C15.1 C16.1 C17.2 C18.2 C19.1 C20.1 C25.1 D1.1 D2.2 D3.2 J1.1 R2.2 R3.2 U1.13 U1.36 U1.48 U2.1 U2.6 U2.10 U3.2 U3.3 U3.9 U3.10 U4.1 U4.7 U4.8 U5.8 U7.5 X1.1 X1.4 | length 43.2
  L1 (SIGNAL) w0.2: U5.8 82.525,74.895 82.96,75.33 83.28,75.33 84.35,76.4 X1.1 X1.4 ; v1(85.2,71.6) C19.1 86,72.9 C17.2 ; U2.1 86.081,75.681 86.081,75.956 86.237,76.112 86.273,76.112 v1(86.273,76.723) ; U2.6 88.7,75.15 C18.2 89.075,75.9 89.258,75.9 89.5,76.142 v1(89.5,76.2) ; U3.3 U3.2 U3.9 U3.10 ; v1(88.7,69) 88.7,69.488 U3.10@88.862,69.65 ; R3.2@90.355,73.705 R3.2 90.425,73.775 91.275,73.775 v1(91.3,73.8) 92.4,73.8 ; R2.2 v1(90.5,77.4) ; D3.2 90.9,68.94 91.1,69.14 C16.1 ; v1(91,80.9) 91.254,80.646 91.979,80.646 C2.1 92,79.9 U1.48 U1.48@92.95,80.125 ; C15.1 92.56,70.66 92.637,70.66 92.677,70.7 94.523,70.7 94.652,70.571 94.652,70.348 v1(94.7,70.3) ; C14.1 92.4,73.8 ; U1.13 92.95,73.8 92.4,73.8 ; v1(93.6,68) D2.2 ; v1@94.7,70.305 U4.1 95.765,70.42 95.765,70.706 95.882,70.823 96.041,70.823 96.35,71.132 U4.8 U4.7 ; U7.5 97.3,84.45 97.75,84.9 98.3,84.9 v1(98.6,85.2) 98.6,84.275 C25.1 ; C4.1@97.338,81.188 97.987,80.538 ; U1.36 98.05,79.075 98.05,80.475 97.987,80.538 ; v1(98.373,80.923) 97.987,80.538 ; C20.1 99.347,72.322 v1(99.347,73.4) ; D1.1 103.25,70.6 v1(103.65,70.2)
  other v1: 90.9,68.9 82.912,75.282
P0.00/XL1: C6.1 U1.2 X2.1 | length 6.7
  L1 (SIGNAL) w0.2: X2.1 86.817,81.183 87.7,81.183 87.7,80.8 88.957,79.543 89.332,79.543 C6.1 90.3,79.475 91.1,78.675 U1.2
P0.01/XL2: C5.1 U1.3 X2.2 | length 6.8
  L1 (SIGNAL) w0.2: X2.2@86.75,79.65 89.015,77.385 89.24,77.385 C5.1 89.56,77.385 89.704,77.385 90.594,78.275 U1.3
RF_ANT: ANT1.1 C12.1 R7.1 | length 2.1
  L1 (SIGNAL) w0.254: R7.1 C12.1 ANT1.1
SWDCLK: J1.2 U1.25 | length 7.7
  L1 (SIGNAL) w0.2: U1.25 98.708,74.675 100.3,73.083 J1.2
SWDIO: J1.3 U1.26 | length 8.7
  L1 (SIGNAL) w0.2: U1.26 98.8,75.075 100.7,73.175 100.7,68.995 J1.3
THERM: BMS1.1 TH1.2 | length 0.9
  L1 (SIGNAL) w0.2: BMS1.1 83.1,86.7 TH1.2
VDD: J3.A9 J3.B9 U6.4 | length 13.3
  L1 (SIGNAL) w0.2: U6.4 96.45,86 96.967,86 103.5,86 104.22,85.28 104.22,84.8 J3.A9@104.362,84.8 ; J3.A9 104.76,84.75 104.76,85.01 105.25,85.5 107.076,85.5 107.154,85.422 107.407,84.97 J3.B9
XC1: C7.1 U1.34 X3.1 | length 10.2
  L1 (SIGNAL) w0.2: U1.34 98.866,78.275 99.425,78.834 99.425,79.375 99.55,79.5 101.65,79.5 C7.1 102.6,79.25 104.633,79.25 104.75,79.367 104.75,80.883 104.633,81 X3.1
XC2: C8.1 U1.35 X3.3 | length 8.9
  L1 (SIGNAL) w0.2: U1.35 98.675,78.675 99.1,79.1 99.1,81.663 99.217,81.78 100.42,81.78 100.55,81.65 C8.1 102.575,80.25 X3.3
pads on no net: BMS1.2 BMS1.3 BMS1.4 BMS1.5 J1.4 J3.MH1 J3.MH2 J3.MH3 J3.MH4 U1.4 U1.5 U1.6 U1.7 U1.9 U1.10 U1.12 U1.15 U1.18 U1.19 U1.20 U1.21 U1.23 U1.28 U1.29 U1.32 U1.40 U1.42 U1.44 U1.47 U3.5 U4.6 U7.4
copper on no net: | length 0
  L1 (SIGNAL) w0.2: 102.55,81 102.575,81 ; 103.9,80 103.925,80

## Polygon pours and split planes (outlines as drawn)
GND on L1 (SIGNAL) "GND_L01_P045" (solid, remove dead copper, pour order 45): 112.25,79.55 112.25,89.725 112.173,89.8 81.3,89.8 81.3,63.8 105.9,63.8 106.075,63.975 106.075,64.125 106.075,79.55
GND on L4 (SIGNAL) "GND_L04_P058" (solid, remove dead copper, pour order 58): 112.25,79.55 112.25,89.725 112.173,89.8 81.3,89.8 81.3,63.8 105.9,63.8 106.075,63.975 106.075,64.125 106.075,79.55
OUT on L3 (3V3) "OUT_L03_P061" (solid, remove dead copper, pour order 61): 112.25,79.55 112.25,89.725 112.173,89.8 81.3,89.8 81.3,63.8 105.9,63.8 106.075,63.975 106.075,64.125 106.075,79.55
GND on L2 (GND) "GND_L02_P062" (solid, remove dead copper, pour order 62): 112.25,79.55 112.25,89.725 112.173,89.8 81.3,89.8 81.3,63.8 105.9,63.8 106.075,63.975 106.075,64.125 106.075,79.55

## Other copper
L1 (SIGNAL):
  pour cut-out: 98.5,77.7 99.6,77.7 99.6,76.2 98.5,76.2
L2 (GND):
  pour cut-out: 106.08,79.548 97.53,79.548 97.53,74.848 106.08,74.848
L3 (3V3):
  pour cut-out: 106.055,79.548 97.505,79.548 97.505,74.848 106.055,74.848